# Altium PCB VoltageRegulatorShield_update.PcbDoc
Units mm, origin at the board's own origin, x right, y up, seen from the top; angles counter-clockwise.
Board outline 83.03 x 53.34 mm, 2 copper layers (Top Layer, Bottom Layer); 23 components, 65 nets, 120 pads, 2 vias.
Unrouted connection lines stored in the file: 4.
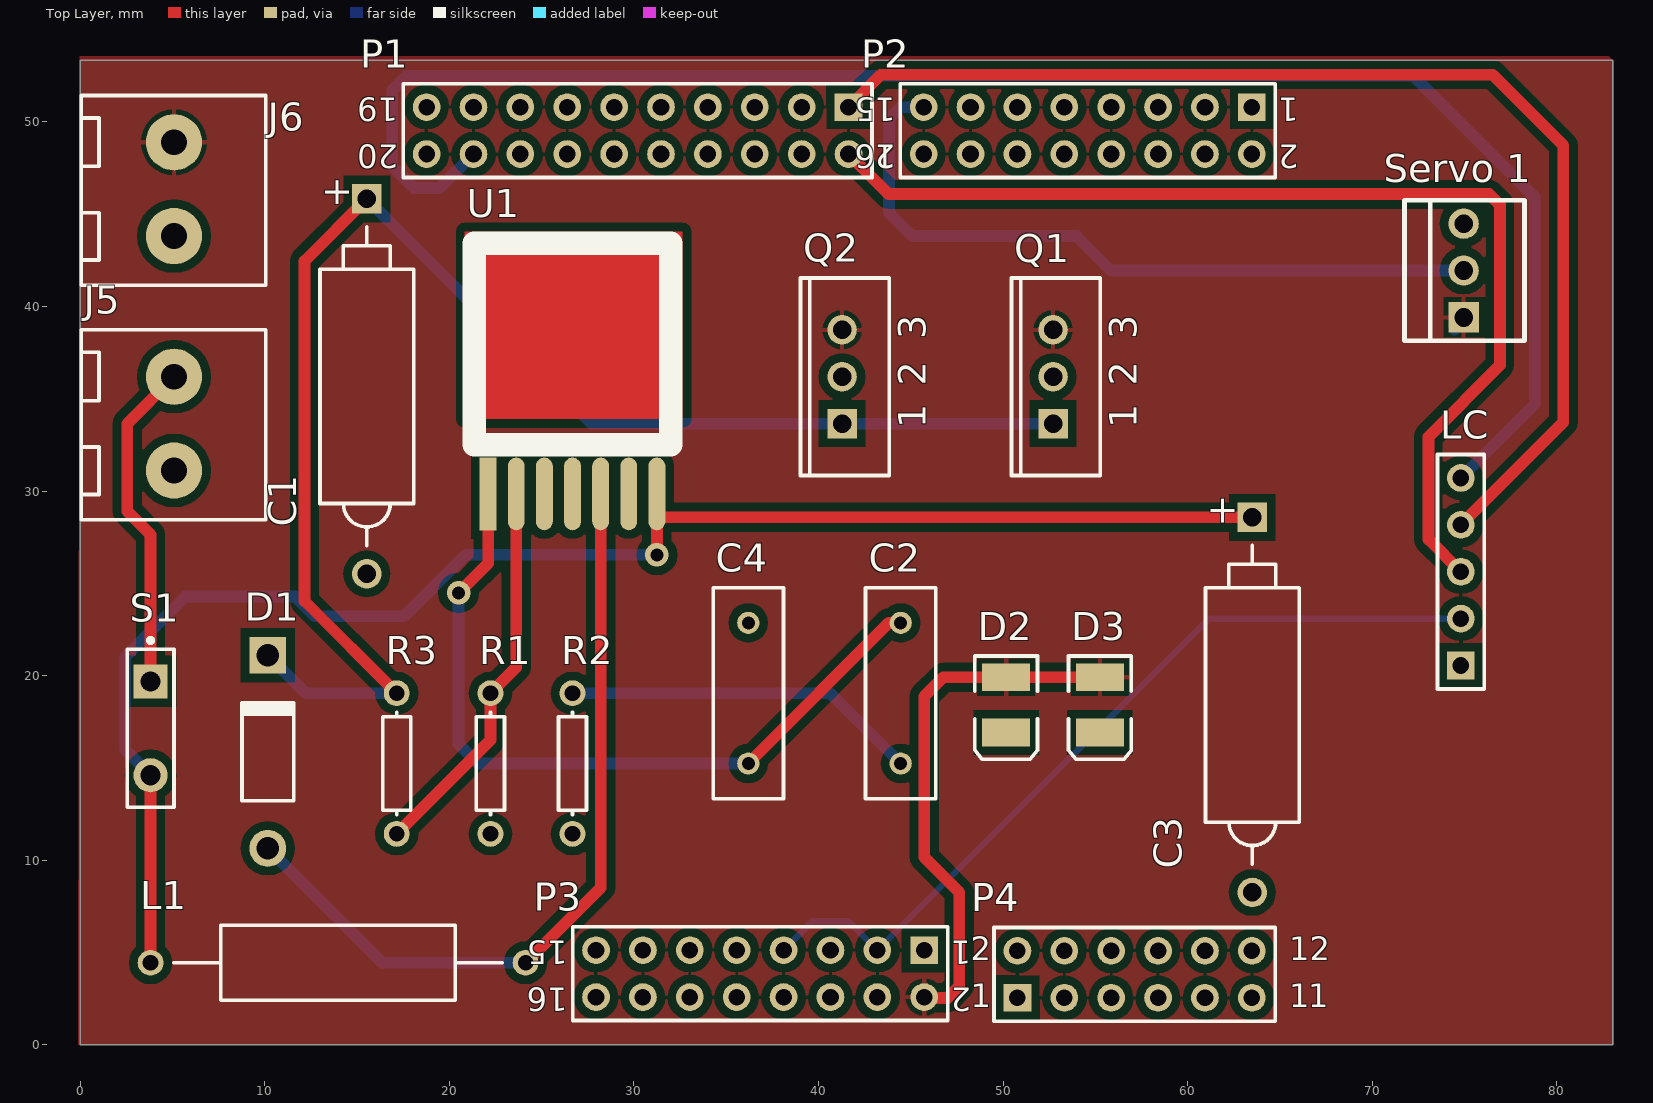
[diagram p0: Top Layer view]
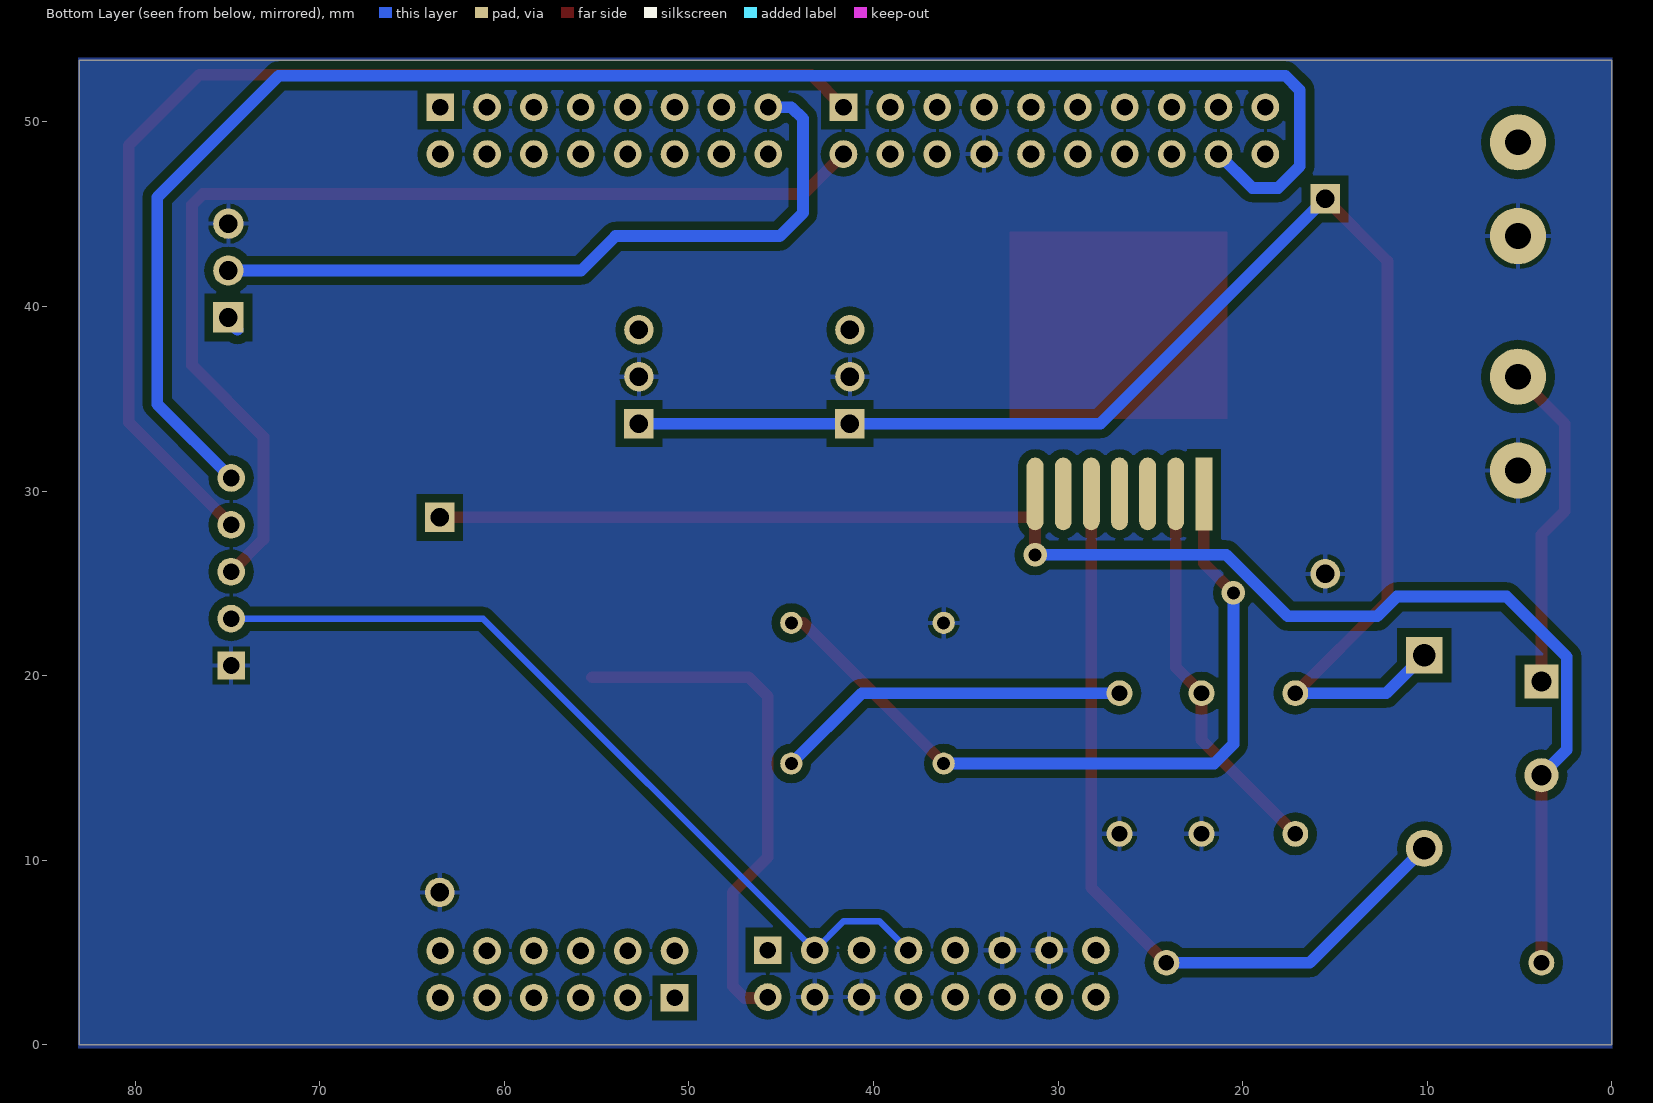
[diagram p1: Bottom Layer view, seen from below]

## Layer stack, top to bottom
Top Solder: solder mask 0.0102, Solder Resist, Dk 3.5
Top Layer: signal copper 0.0356
Dielectric1: dielectric 0.32, FR-4, Dk 4.8
Bottom Layer: signal copper 0.0356
Bottom Solder: solder mask 0.0102, Solder Resist, Dk 3.5

## Board outline
0,0 0,53.34 63.5,53.34 83.025,53.34 83.025,0 66.04,0

## Design rules (kind name [scope] priority, off if disabled: settings)
Clearance [All] p1: gap=0.457
PolygonConnect [All] p1: connectstyle=Relief reliefconductorwidth=0.254 reliefentries=4 polygonreliefangle="90 Angle" airgapwidth=0.254
RoutingVias [All] p1: holewidth=0.711 width=1.27 viastyle="Through Hole" minholewidth=0.711 minwidth=1.27 maxholewidth=0.711 maxwidth=1.27
SilkToSolderMaskClearance SilkscreenOverComponentPads [IsPad] p1: minsilkscreentomaskgap=0.254 clearancetoexposedcopper=TRUE
SolderMaskExpansion [All] p1: expansion=0.102
Width [All] p1: maxlimit=4 minlimit=0.1 preferedwidth=0.35 minimp=50.000000 maximp=50.000000 favimp=50.000000
29 further rules are at their usual default settings.

## Components (designator, comment, footprint, x,y, rotation, side; value= is the part's Value field where it differs from the comment)
C1 "Cap Pol2" POLAR0.8 15.525,35.675 r90 top
C2 "Cap" RAD-0.3 44.45,19.05 r90 top
C3 "Cap Pol2" POLAR0.8 63.5,18.415 r90 top
C4 "Cap" RAD-0.3 36.195,19.05 r270 top
D1 "Diode 1N4934" DO-41 10.16,15.875 r90 top
D2 "LED3" 3.5X2.8X1.9 50.165,18.415 r270 top
D3 "LED3" 3.5X2.8X1.9 55.245,18.415 r270 top
J5 "282857-2" 282857-2 5.08,36.195 r180 top
J6 "282857-2" 282857-2 5.08,48.895 r180 top (schematic designator J5)
L1 "Inductor Adj" AXIAL-0.8 13.97,4.445 r180 top
LC "Header 5" HDR1X5 74.8,20.55 r90 top
P1 "Header 10X2" HDR2X10 41.625,50.8 r180 top
P2 "Header 8X2" HDR2X8 63.475,50.8 r180 top
P3 "Header 8X2" HDR2X8 45.725,5.125 r180 top
P4 "Header 6X2" HDR2X6 50.775,2.55 r0 top
Q1 "SCR" TO-220-AB 52.705,36.195 r90 top
Q2 "SCR" TO-220-AB 41.275,36.195 r90 top
R1 "Res1" AXIAL-0.3 22.225,15.24 r90 top
R2 "Res1" AXIAL-0.3 26.67,15.24 r90 top
R3 "Res1" AXIAL-0.3 17.145,15.24 r90 top
S1 "SW-PB" SPST-2 3.81,17.145 r270 top
"Servo 1" "640454-3" 6404543 74.95,41.95 r180 top
U1 "LT1370" DDPak7 26.67,29.845 r0 top

## Footprints (in the part's own frame and the unit in brackets; to place one, negate y for a bottom-side part, rotate by r counter-clockwise, add the part's x,y. Pads: shape width x height; smd on the part's side, far side on the other; paste and mask are expansions set on the pad)
3.5X2.8X1.9 [mm] "SM LED; 2 C-Bend Leads; Body 3.5 x 2.8 x 1.9 mm, inc leads (LxWxH typ)"
  rect 1.5x2.6 smd: 1(-1.5,0) 2(1.5,0)
  silkscreen extent -2.65,-1.7 2.95,1.7
282857-2 [mil] "TE CONNECTIVITY / BUCHANAN  282857-2  Wire-To-Board Terminal Block, 2, 300 V, 24 A, 30 AWG, 12 AWG, 3 mm²"
  round 120 hole 55: 1(0,0) 2(0,200)
  silkscreen extent -196,-100 198,305, body extent -196,-100 198,320, height 752
6404543 [mil] "Headers & Wire Housings POLARIZED HEADER 3P Straight Post tin"
  rect 65x65 hole 40: 1(0,100)
  round 65 hole 40: 2(0,0) 3(0,-100)
  silkscreen extent -130,-150 126,150, body extent -130,-150 125,150, height 395
AXIAL-0.3 [mm] "Axial Device, Thru-Hole; 2 Leads; 0.3 in Pin Spacing"
  round 1.4 hole 0.85: 1(-3.81,0) 2(3.81,0)
  silkscreen extent -2.77,-0.76 2.77,0.76
AXIAL-0.8 [mm] "Axial Device, Thru-Hole; 2 Leads; 0.8 in Pin Spacing"
  round 1.4 hole 0.85: 1(-10.16,0) 2(10.16,0)
  silkscreen extent -8.89,-2.03 8.89,2.03
DDPak7 [mil] "7 Lead Plastic DD Pak"
  rect 36x155 smd: 1(-180,0)
  oval 36x155 smd: 2(-120,0) 3(-60,0) 4(0,0) 5(60,0) 6(120,0) 7(180,0)
  rect 36x155 smd far side: B1(-180,0)
  oval 36x155 smd far side: B2(-120,0) B3(-60,0) B4(0,0) B5(60,0) B6(120,0) B7(180,0)
  Top Layer region: -230,160 235,160 235,560 -230,560
  silkscreen extent -210,105 210,535
DO-41 [mm] "Diode, Axial; Body 5.2 x 2.7 mm (LxDia. max), Lead Dia. 0.86 mm (max)"
  round 2 hole 1.2: 1(-5.23,0)
  rect 2x2 hole 1.2: 2(5.23,0)
  silkscreen extent -2.65,-1.4 2.75,1.4
HDR1X5 [mm] "Connector; Header; 5 Position"
  rect 1.5x1.5 hole 0.9: 1(0,0)
  round 1.5 hole 0.9: 2(2.54,0) 3(5.08,0) 4(7.62,0) 5(10.16,0)
  silkscreen extent -1.27,-1.27 11.43,1.27
HDR2X6 [mm] "Connector; Header; 6x2 Position"
  rect 1.5x1.5 hole 0.9: 1(0,0)
  round 1.5 hole 0.9: 2(0,2.54) 3(2.54,0) 4(2.54,2.54) 5(5.08,0) 6(5.08,2.54) 7(7.62,0) 8(7.62,2.54) 9(10.16,0) 10(10.16,2.54) 11(12.7,0) 12(12.7,2.54)
  silkscreen extent -1.27,-1.27 13.97,3.81
HDR2X8 [mm] "Connector; Header; 8x2 Position"
  rect 1.5x1.5 hole 0.9: 1(0,0)
  round 1.5 hole 0.9: 2(0,2.54) 3(2.54,0) 4(2.54,2.54) 5(5.08,0) 6(5.08,2.54) 7(7.62,0) 8(7.62,2.54) 9(10.16,0) 10(10.16,2.54) 11(12.7,0) 12(12.7,2.54) 13(15.24,0) 14(15.24,2.54) 15(17.78,0) 16(17.78,2.54)
  silkscreen extent -1.27,-1.27 19.05,3.81
HDR2X10 [mm] "Connector; Header; 10x2 Position"
  rect 1.5x1.5 hole 0.9: 1(0,0)
  round 1.5 hole 0.9: 2(0,2.54) 3(2.54,0) 4(2.54,2.54) 5(5.08,0) 6(5.08,2.54) 7(7.62,0) 8(7.62,2.54) 9(10.16,0) 10(10.16,2.54) 11(12.7,0) 12(12.7,2.54) 13(15.24,0) 14(15.24,2.54) 15(17.78,0) 16(17.78,2.54) 17(20.32,0) 18(20.32,2.54) 19(22.86,0) 20(22.86,2.54)
  silkscreen extent -1.27,-1.27 24.13,3.81
POLAR0.8 [mm] "Polarized Capacitor; 2 Leads"
  rect 1.6x1.6 hole 1: 1(10.16,0)
  round 1.6 hole 1: 2(-10.16,0)
  silkscreen extent -8.64,-2.54 8.64,2.54
RAD-0.3 [mm] "Radial Cap, Thru-Hole; 2 Leads; 0.3 in Pin Spacing"
  round 1.2 hole 0.7: 1(-3.81,0) 2(3.81,0)
  silkscreen extent -5.71,-1.91 5.71,1.91
SPST-2 [mm] "Switch; 2 Leads"
  rect 1.85x1.85 hole 1.1: 1(-2.54,0)
  round 1.85 hole 1.1: 2(2.54,0)
  silkscreen extent -4.89,-1.27 4.28,1.27
TO-220-AB [mm] "TO, Thru-Hole, Vertical, Heatsink Mounted; 3 In-Line Leads; Pitch 2.54 mm"
  rect 1.6x1.6 hole 1: 1(-2.54,0)
  round 1.6 hole 1: 2(0,0) 3(2.54,0)
  silkscreen extent -5.35,-2.55 5.35,2.25

## Part data
C1 C3: "Polarized Capacitor (Axial)"
C2 C4: "Capacitor"
D1: "1 Amp Fast Recovery Rectifier"
D2 D3: "Typical BLUE SiC LED"
J5 J6: "TERM BLOCK 2POS SIDE ENT 5.08MM"
L1: "Adjustable Inductor"
LC: "Header, 5-Pin"
P1: "Header, 10-Pin, Dual row"
P2 P3: "Header, 8-Pin, Dual row"
P4: "Header, 6-Pin, Dual row"
Q1 Q2: "Silicon Controlled Rectifier"
R1 R2 R3: "Resistor"
S1: "Switch"
"Servo 1": "Headers & Wire Housings POLARIZED HEADER 3P Straight Post tin"

## Via types
v1: diameter 1.27, hole 0.711, Top Layer to Bottom Layer, 2 vias

## Nets (pads, with @x,y where several pads share a name; then routed paths per layer and width w, separated by ;. In a path a pad name is that pad's centre, name@x,y a point inside that pad or via, vN(x,y) a via of type N, cw(c..) or ccw(c..) an arc to the next point about the centre after c; other vN are vias at no path point)
3V3: LC.2 P3.3 P3.7 | length 45.4
  Bottom Layer w0.35: P3.7 39.686,6.706 41.604,6.706 P3.3 61.15,23.09 LC.2
"5-9 VIN": P3.15
5V/USB: P3.9
+5V_OUT: "Servo 1.1" D2.1 D3.1 J6.1 P3.2 Q1.3 Q2.3 | length 30
  Top Layer w0.635: P3.2 45.72,2.54 45.725,2.54 46.99,2.54 47.625,3.175 47.625,8.255 45.72,10.16 45.72,18.875 46.76,19.915 D2.1 D3.1
  Bottom Layer w0.635: 74.46,38.735 75.388,39.663
+12V_OUT: C1.1 D1.2 Q1.1 Q2.1 R3.2 | length 80.3
  Top Layer w0.635: C1.1 12.15,42.46 12.15,24.045 R3.2
  Bottom Layer w0.635: D1.2 12.215,19.05 R3.2 ; C1.1 27.705,33.655 Q2.1 Q1.1
+V_BAT: C3.1 L1.2 S1.2 U1.7 | length 84.7
  Top Layer w0.635: L1.2 S1.2 ; v1(31.242,26.543) U1.7@31.242,28.575 ; U1.7 U1.7@31.242,28.575 ; C3.1 U1.7@31.242,28.575
  Bottom Layer w0.635: S1.2 2.438,15.977 2.438,21.031 5.69,24.282 11.643,24.282 12.7,23.225 17.561,23.225 20.879,26.543 v1(31.242,26.543)
AREF: P1.6
GND: "Servo 1.3" C1.2 C3.2 C4.1 D2.2 D3.2 J5.2 J6.2 LC.1 P1.8 P3.4 P3.6 P3.11 P3.13 Q1.2 Q2.2 R1.1 R2.1 U1.3 U1.4
NC: P1.5
NetC2_1: C2.1 R2.2 | length 19.4
  Bottom Layer w0.635: R2.2 40.64,19.05 C2.1
NetC2_2: C2.2 C4.2 U1.1 | length 41.8
  Top Layer w0.635: v1(20.498,24.486) 22.098,26.086 U1.1 ; C4.2 43.815,22.86 C2.2
  Bottom Layer w0.635: v1(20.498,24.486) 20.498,16.281 21.539,15.24 C4.2
NetD1_1: D1.1 L1.1 U1.5 | length 43.6
  Top Layer w0.635: L1.1 28.194,8.509 U1.5
  Bottom Layer w0.635: D1.1 16.36,4.445 L1.1
NetJ5_1: J5.1 S1.1 | length 18.1
  Top Layer w0.635: S1.1 3.81,27.635 2.54,28.905 2.54,33.655 J5.1
NetR1_2: R1.2 R3.1 U1.2 | length 21.1
  Top Layer w0.635: R3.1 22.225,16.51 R1.2 23.622,20.447 U1.2
PTA1: P2.14
PTA2: P2.16
PTA4: P2.8
PTA5: P2.6
PTA12: P2.10
PTA13: P1.20
PTA16: P1.11
PTA17: P1.9
PTB0: P4.1
PTB1: P4.3
PTB2: P4.5
PTB3: P4.7
PTB11: P3.8
PTC0: P2.13
PTC1: P4.11
PTC2: P4.9
PTC3: P2.11
PTC4: P2.9
PTC5: P2.7
PTC6: P2.5
PTC7: "Servo 1.2" P2.15 | length 39.7
  Bottom Layer w0.635: P2.15 44.45,50.8 43.815,50.165 43.815,45.085 45.085,43.815 53.975,43.815 55.84,41.95 74.95,41.95
PTC8: P2.4
PTC9: P2.2
PTC10: P2.3
PTC11: P2.1
PTC12: P1.19
PTC13: P1.17
PTC16: P1.15
PTC17: P1.13
PTD0: P1.16
PTD1: P1.10
PTD2: P1.14
PTD3: P1.12
PTD4: P2.12
PTD5: LC.5 P1.18 | length 91.6
  Bottom Layer w0.635: P1.18 19.47,46.425 18.075,46.425 16.9,47.6 16.9,51.725 17.675,52.5 72.225,52.5 78.8,45.925 78.8,34.71 LC.5
PTD6: P1.3
PTD7: LC.4 P1.1 | length 63.9
  Top Layer w0.635: P1.1 43.375,52.55 76.525,52.55 80.35,48.725 80.35,33.72 LC.4
PTE0: P1.4
PTE1: LC.3 P1.2 | length 58.6
  Top Layer w0.635: P1.2 43.795,46.09 76.335,46.09 76.918,45.507 76.918,36.818 73.05,32.95 73.05,27.38 LC.3
PTE2: P3.10
PTE3: P3.12
PTE4: P3.14
PTE5: P3.16
PTE20: P4.2
PTE21: P4.4
PTE22: P4.6
PTE23: P4.8
PTE29: P4.10
PTE30: P4.12
PTE31: P1.7
SDA_PTD5: P3.1
pads on no net: P3.5 U1.6 U1.B1 U1.B2 U1.B3 U1.B4 U1.B5 U1.B6 U1.B7

## Polygon pours and split planes (outlines as drawn)
GND on Bottom Layer "Bottom Layer-GND" (solid, pour order 30): -0.025,53.575 83.075,53.575 83.075,0 -0.025,0
+5V_OUT on Top Layer "Top Layer-5V" (solid, pour order 32): -0.025,53.55 82.8,53.55 82.975,53.375 83.075,53.275 83.075,0 0.075,0 -0.1,-0.175

## Silkscreen, mask and mechanical layers (free items; w line width, h text height)
Top Overlay:
  text "RESET" at 32.893,-63.881 h0.51 r45
  text "3v3" at 35.433,-63.881 h0.51 r45
  text "5v" at 37.973,-63.881 h0.51 r45
  text "GND" at 40.513,-63.881 h0.51 r45
  text "GND" at 43.053,-63.881 h0.51 r45
  text "Vin" at 45.593,-63.881 h0.51 r45

## Text inside footprints (layer, text, board x,y; h text height)
C1: Top Overlay "+" at 14.575,45.327 h1.5 r90
C3: Top Overlay "+" at 62.55,28.067 h1.5 r90
P1: Top Overlay "20" at 17.241,48.768 h1.27 r180; Top Overlay "19" at 17.241,51.308 h1.27 r180; Top Overlay "1" at 44.165,51.308 h1.27 r180; Top Overlay "2" at 44.165,48.768 h1.27 r180
P2: Top Overlay "2" at 66.015,48.768 h1.27 r180; Top Overlay "1" at 66.015,51.308 h1.27 r180; Top Overlay "15" at 44.171,51.308 h1.27 r180; Top Overlay "16" at 44.171,48.768 h1.27 r180
P3: Top Overlay "2" at 48.265,3.093 h1.27 r180; Top Overlay "1" at 48.265,5.633 h1.27 r180; Top Overlay "15" at 26.421,5.633 h1.27 r180; Top Overlay "16" at 26.421,3.093 h1.27 r180
P4: Top Overlay "12" at 65.507,4.582 h1.27; Top Overlay "1" at 66.523,2.042 h1.27; Top Overlay "1" at 65.507,2.042 h1.27; Top Overlay "1" at 48.235,2.042 h1.27; Top Overlay "2" at 48.235,4.582 h1.27
Q1: Top Overlay "3" at 57.23,38.235 h1.5 r90; Top Overlay "2" at 57.23,35.695 h1.5 r90; Top Overlay "1" at 57.23,33.405 h1.5 r90
Q2: Top Overlay "3" at 45.8,38.235 h1.5 r90; Top Overlay "2" at 45.8,35.695 h1.5 r90; Top Overlay "1" at 45.8,33.405 h1.5 r90